# EAGLE board schematic (EAGLE 7.5.0)
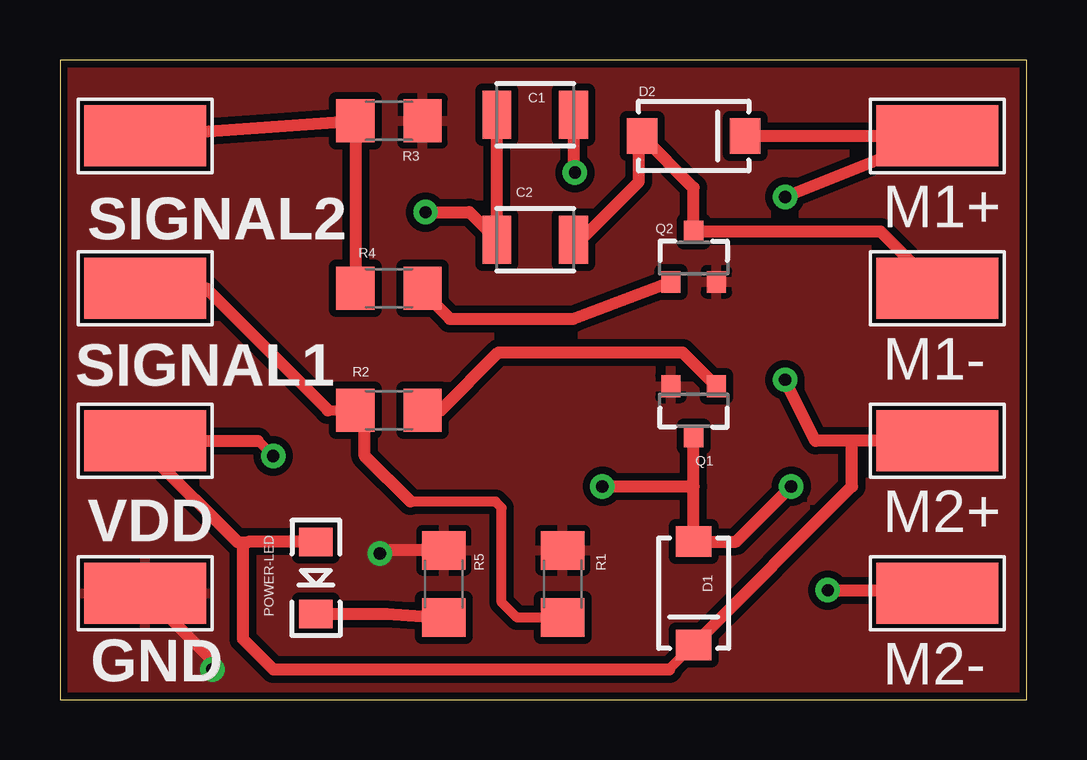
[diagram p0: board, top side]
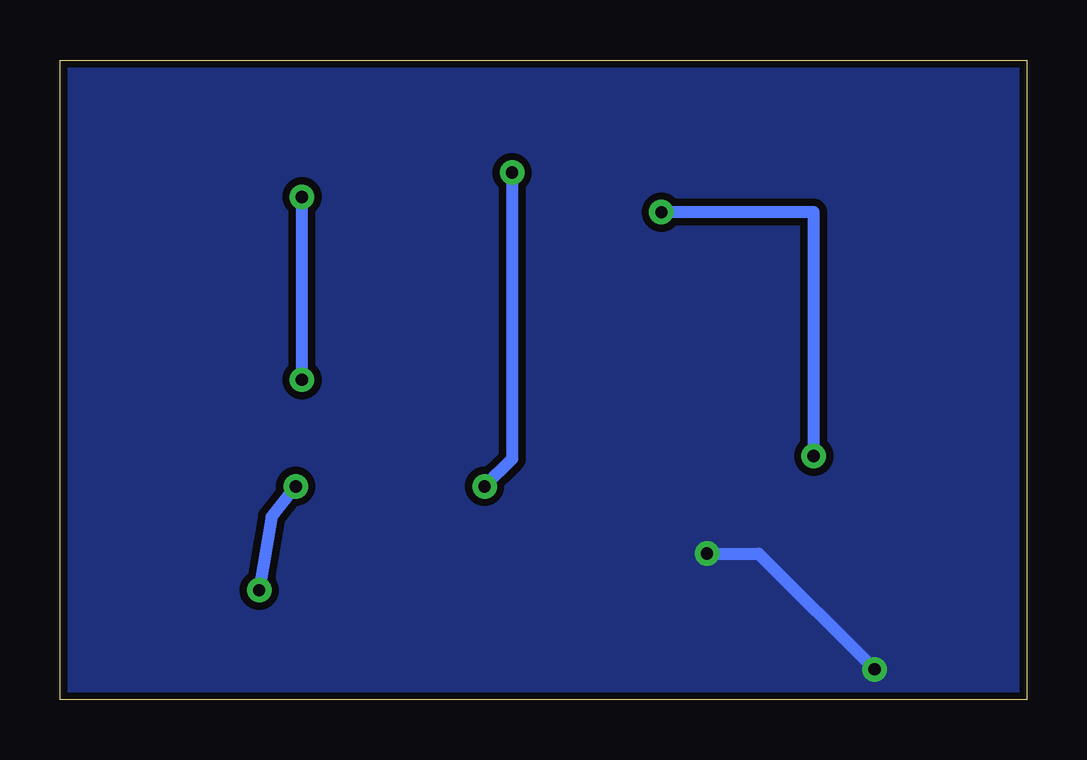
[diagram p1: board, bottom side, seen from below]

Size 40.31 x 26.66 mm. Coordinates in mm from the lower left corner, seen from the top.
Outline: 0,0 40.31,0 40.31,26.66 0,26.66 0,0
Copper layers (1*16): Top 0.035mm / dielectric 1.5mm / Bottom 0.035mm
Design rules "SparkFun": minimum track width 8mil, minimum drill 20mil, track to track 8mil, track to pad 8mil, pad to pad 8mil, via to via 8mil, smd to smd 8mil, copper to edge 8mil, drill to drill 8mil, minimum pad ring 12mil, minimum via ring 10mil, stop-mask expansion 4mil, vias tented up to drill 20mil, thermal gap 10mil

## Footprints (pad centres in the part's own frame; a part is rotated, then mirrored left to right if it is on the bottom)
1210 = smd 1.2 x 2: 1 -1.6,0; 2 1.6,0
SMA-DIODE = smd 1.27 x 1.47: A -2.15,0; C 2.15,0
5-2,5 = smd 2.54 x 5.08: 1 0,0
LED-1206 = smd 1.2 x 1.4: A -1.5,0; C 1.5,0
SOT23-3 = smd 0.8 x 0.9: 1 -0.95,-1; 2 0.95,-1; 3 0,1.1
1206 = smd 1.6 x 1.8: 1 -1.4,0; 2 1.4,0

## Placement (x,y rotation side)
C1  100nF  [1210]  19.81,24.38 0 top
C2  100nF  [1210]  19.81,19.18 0 top
D1  BA340A  [SMA-DIODE]  26.42,4.45 270 top
D2  BA340A  [SMA-DIODE]  26.42,23.5 0 top
FRAME1  FRAME-LETTER  [CREATIVE_COMMONS]  -101.6,20.32 0 top  (outside the outline)
GND  WIREPADSMD5-2,5  [5-2,5]  3.56,4.45 90 top
MOTOR-NEGATIVE1  WIREPADSMD5-2,5  [5-2,5]  36.58,4.45 90 top
MOTOR-NEGATIVE2  WIREPADSMD5-2,5  [5-2,5]  36.58,17.14 90 top
MOTOR-POSITIVE1  WIREPADSMD5-2,5  [5-2,5]  36.58,10.79 90 top
MOTOR-POSITIVE2  WIREPADSMD5-2,5  [5-2,5]  36.58,23.5 90 top
POWER-LED  [LED-1206]  10.67,5.08 270 top
Q1  200mA/50V  [SOT23-3]  26.42,12.06 180 top
Q2  200mA/50V  [SOT23-3]  26.42,18.41 0 top
R1  10K  [1206]  20.95,4.83 270 top
R2  100  [1206]  13.72,12.06 0 top
R3  10K  [1206]  13.72,24.13 180 top
R4  100  [1206]  13.72,17.14 0 top
R5  220  [1206]  16,4.83 270 top
SIGNAL1  WIREPADSMD5-2,5  [5-2,5]  3.56,17.14 90 top
SIGNAL2  WIREPADSMD5-2,5  [5-2,5]  3.56,23.5 90 top
VDD  WIREPADSMD5-2,5  [5-2,5]  3.56,10.79 90 top

## Library data of the parts
C1 C2 = SparkFun-Passives
D1 D2 = SparkFun-DiscreteSemi; PROD_ID: DIO-09886
FRAME1 = SparkFun-Aesthetics
GND MOTOR-NEGATIVE1 MOTOR-NEGATIVE2 MOTOR-POSITIVE1 MOTOR-POSITIVE2 SIGNAL1 SIGNAL2 VDD = wirepad
POWER-LED = SparkFun-LED
Q1 Q2 = SparkFun-DiscreteSemi; PROD_ID: TRANS-00830
R1-R5 = SparkFun-Resistors

## Nets
GND: GND.1 Q1.2 Q2.2 R1.1 R3.1 R5.1
N$1: Q1.1 R2.2
N$2: R1.2 R2.1 SIGNAL1.1
N$3: C1.2 D1.A MOTOR-NEGATIVE1.1 Q1.3
N$4: Q2.1 R4.2
N$5: POWER-LED.C R5.2
N$6: C2.2 D2.A MOTOR-NEGATIVE2.1 Q2.3
SIGNAL2: R3.2 R4.1 SIGNAL2.1
VDD: C1.1 C2.1 D1.C D2.C MOTOR-POSITIVE1.1 MOTOR-POSITIVE2.1 POWER-LED.A VDD.1

## Tracks (layer width: path | path; a pad name or v marks a point on that pad's centre or on a via)
GND  (via drill 0.51)
  Top 0.406: 13.46,6.23 v13.34,6.1 | v6.35,1.27 6.35,1.65
  Top 0.508: R5.1 13.46,6.23 | 6.35,1.65 GND.1
  Bottom 0.508: v13.34,6.1 11.18,6.1 v6.35,1.27
  pour Top (isolate 0.305): 0,0 0,26.67 40.64,26.67 40.64,0
  pour Bottom (isolate 0.305): 0,0 0,26.67 40.64,26.67 40.64,0
N$1
  Top 0.508: R2.2 15.88,12.06 18.29,14.48 25.95,14.48 Q1.1
N$2
  Top 0.406: SIGNAL1.1 6.1,17.14 | 11.18,12.06 R2.1 12.7,11.68 | R1.2 19.05,3.43 18.41,4.06 18.41,8 18.16,8.26 14.61,8.26
  Top 0.508: 6.1,17.14 11.18,12.06 | 14.61,8.26 12.7,10.16 12.7,11.68
N$3  (via drill 0.51)
  Top 0.406: 36.45,4.57 MOTOR-NEGATIVE1.1
  Top 0.508: v32,4.57 36.45,4.57 | v30.48,8.89 28.18,6.59 D1.A 26.42,8.89 | 26.42,8.89 Q1.3 | C1.2 21.41,22.02 v21.46,21.97 | v22.61,8.89 26.42,8.89
  Bottom 0.508: v30.48,8.89 31.5,7.62 v32,4.57 | v21.46,21.97 21.46,10.03 v22.61,8.89
N$4
  Top 0.406: R4.2 15.12,17.02
  Top 0.508: 15.12,17.02 16.26,15.88 21.39,15.88 Q2.1
N$5
  Top 0.508: POWER-LED.C 13.62,3.58 R5.2
N$6
  Top 0.406: C2.2 21.72,19.18 | 24.13,23.36 D2.A
  Top 0.508: D2.A 26.42,21.34 Q2.3 34.21,19.52 MOTOR-NEGATIVE2.1 | 21.72,19.18 24.13,21.59 24.13,23.36
SIGNAL2
  Top 0.406: R3.2 12.45,23.5
  Top 0.508: SIGNAL2.1 R3.2 R4.1
VDD  (via drill 0.51)
  Top 0.406: POWER-LED.A 7.39,6.58 | 3.81,10.16 3.81,10.54 VDD.1 | 7.85,6.58 7.62,6.35 | 25.39,1.27 D1.C | 8.26,10.79 v8.89,10.16
  Top 0.508: D2.C MOTOR-POSITIVE2.1 v30.23,20.95 | MOTOR-POSITIVE1.1 33.02,10.79 | 33.02,10.79 31.5,10.79 v30.23,13.34 | 7.39,6.58 3.81,10.16 | POWER-LED.A 7.85,6.58 | 7.62,6.35 7.62,2.54 8.89,1.27 25.39,1.27 | D1.C 33.02,8.89 33.02,10.79 | VDD.1 8.26,10.79 | v15.24,20.32 17.07,20.32 C2.1 C1.1
  Bottom 0.508: v30.23,13.34 v30.23,20.95 | v8.89,10.16 8.89,20.32 v15.24,20.32

## Text on the board
tPlace: M1+ | SIGNAL2 | SIGNAL1 | M1- | VDD | M2+ | GND | M2-